# Altium PCB PCB1.PcbDoc
Units mm, origin at the board's own origin, x right, y up, seen from the top; angles counter-clockwise.
Board outline 58.42 x 34.29 mm, 2 copper layers (Top Layer, Bottom Layer); 38 components, 21 nets, 92 pads, 15 vias.
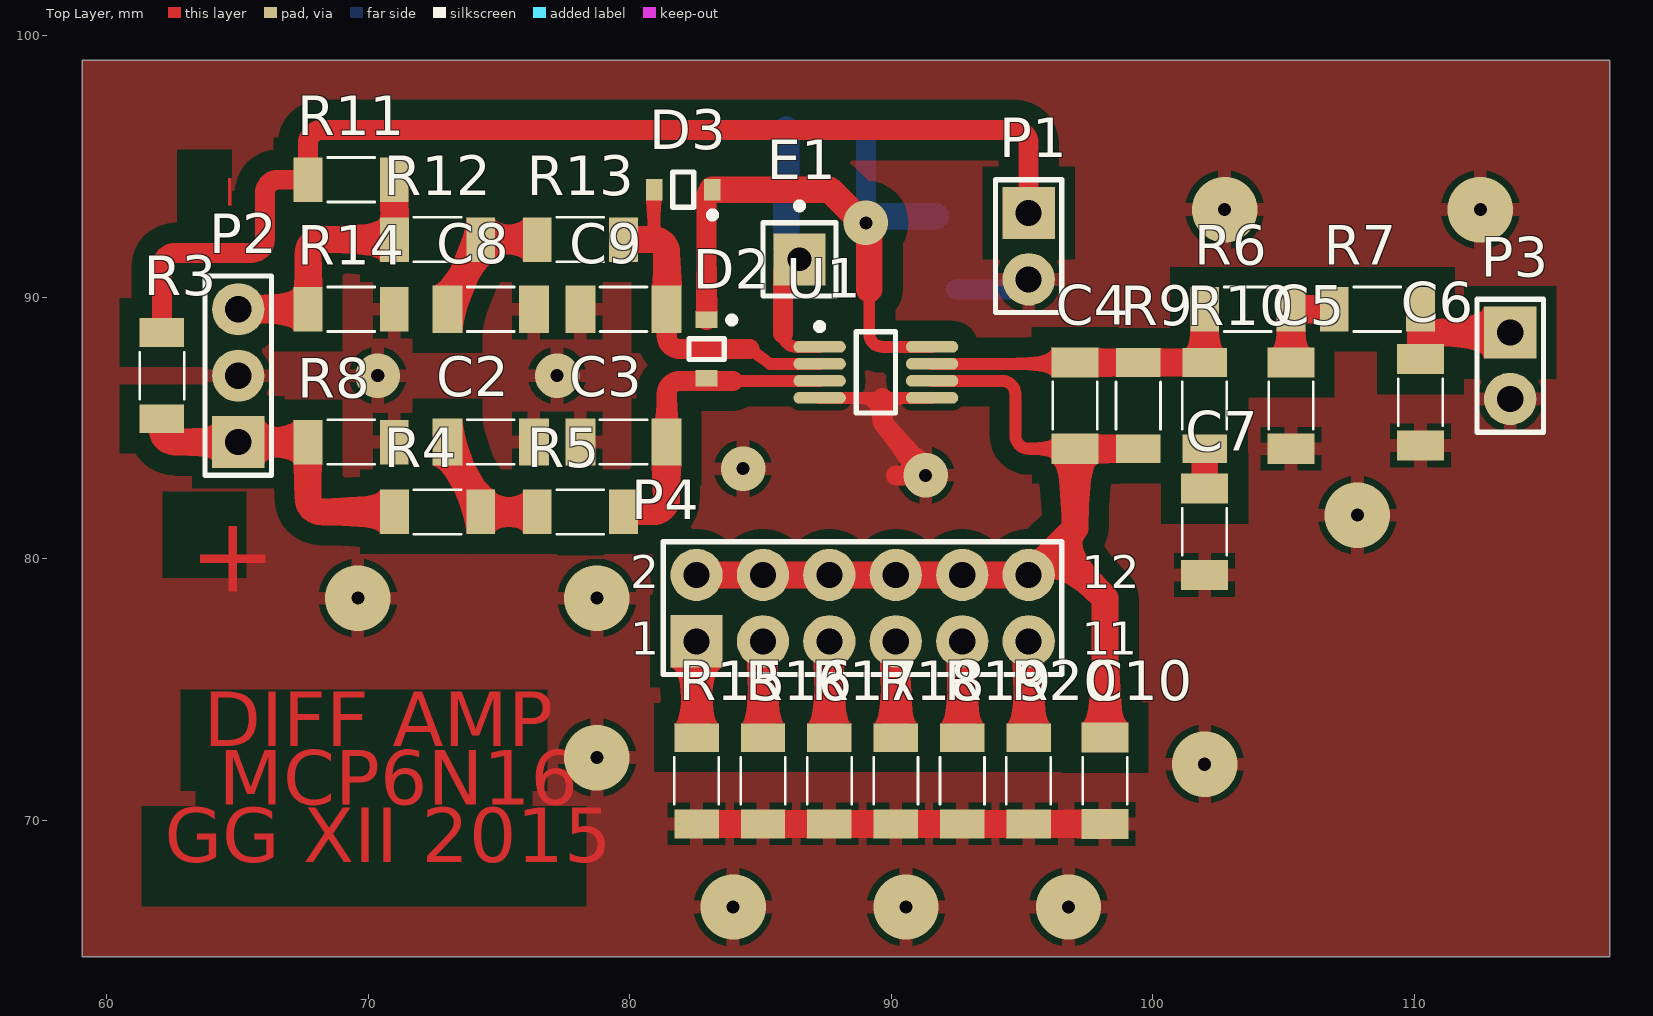
[diagram p0: Top Layer view]
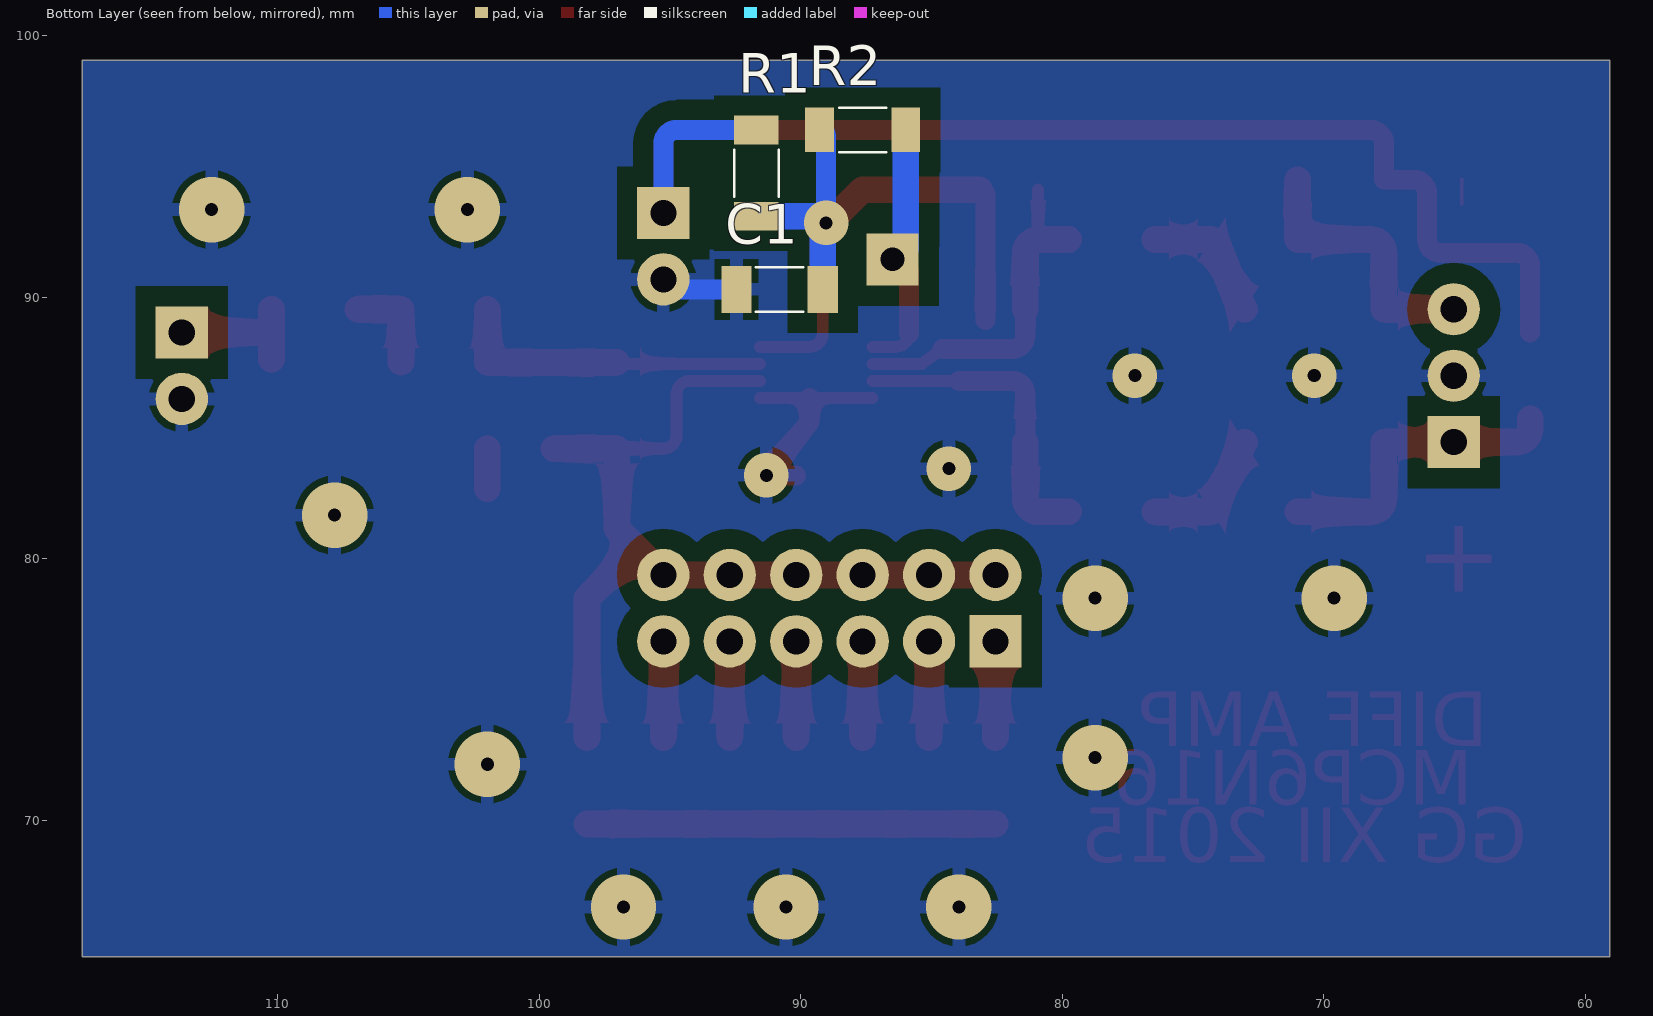
[diagram p1: Bottom Layer view, seen from below]
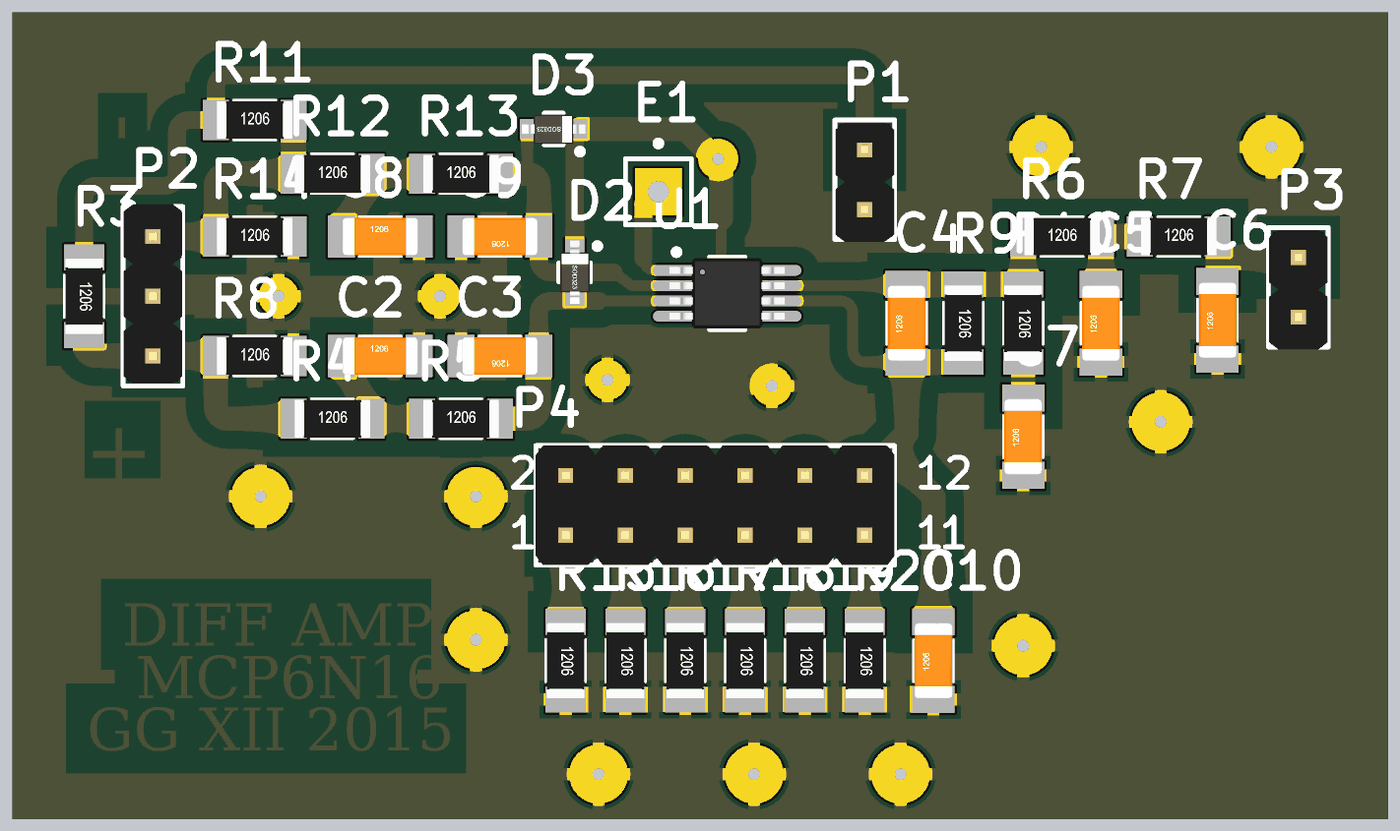
[diagram p2: 3D render of the assembled board from above, using the file's embedded part models]
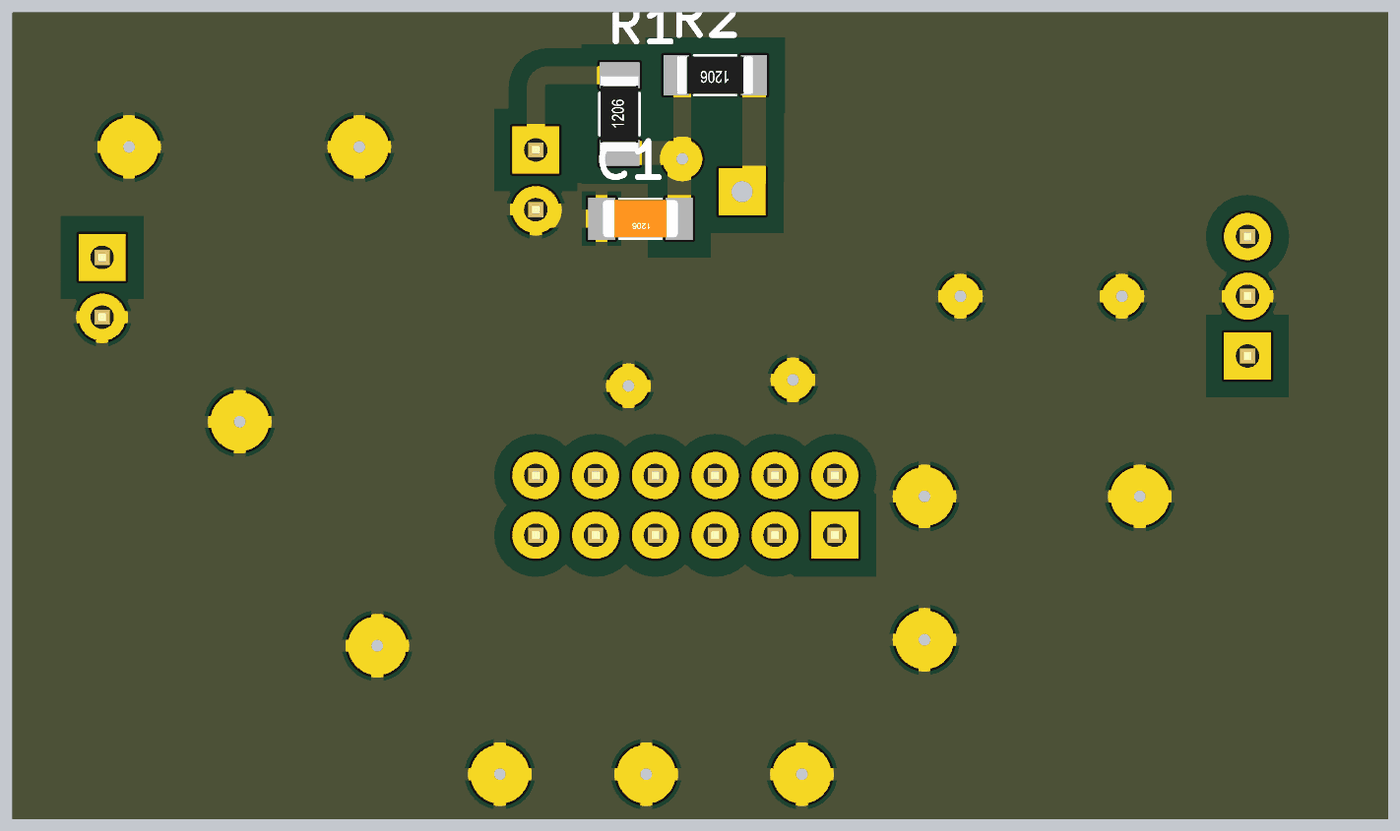
[diagram p3: 3D render of the assembled board from below, using the file's embedded part models]

## Layer stack, top to bottom
Top Solder: solder mask 0.0102, Solder Resist, Dk 3.5
Top Layer: signal copper 0.0356
Dielectric 1: dielectric 0.32, FR-4, Dk 4.8
Bottom Layer: signal copper 0.0356
Bottom Solder: solder mask 0.0102, Solder Resist, Dk 3.5

## Board outline
59.055,64.77 59.055,99.06 117.475,99.06 117.475,64.77

## Design rules (kind name [scope] priority, off if disabled: settings)
Clearance [All] p1: gap=0.254 except(0.762: Arc-Poly Track-Poly SMDPad-Poly THPad-Poly Via-Poly Fill-Poly Poly-Poly Poly-Region Poly-Text)
PolygonConnect [All] p1: connectstyle=Relief reliefconductorwidth=0.508 reliefentries=4 polygonreliefangle="90 Angle" airgapwidth=0.254
RoutingVias [All] p1: holewidth=0.711 width=1.27 viastyle="Through Hole" minholewidth=0.711 minwidth=1.27 maxholewidth=0.711 maxwidth=1.27
SolderMaskExpansion [All] p1: expansion=0.102
Width [All] p1: maxlimit=2.54 minlimit=0.254 preferedwidth=0.508 minimp=50.000000 maximp=50.000000 favimp=50.000000
30 further rules are at their usual default settings.

## Classes and differential pairs
component class Designator: C1 C2 C3 C4 C5 C6 C7 C8 C9 C10 D2 D3 P4 R1 R2 R3 R4 R5 R6 R7 R8 R9 R10 R11 R12 R13 R14 R15 R16 R17 R18 R19 R20 U1
component class top: E1 P1 P2 P3

## Components (designator, comment, footprint, x,y, rotation, side; value= is the part's Value field where it differs from the comment)
C1 "C" C1206 90.805,90.297 r0 bottom
C2 "C" C1206 74.676,84.455 r0 top
C3 "C" C1206 79.756,84.455 r180 top
C4 "C" C1206 97.028,85.852 r90 top
C5 "C" C1206 105.283,85.852 r90 top
C6 "C" C1206 110.236,85.979 r90 top
C7 "C" C1206 101.981,81.026 r90 top
C8 "C" C1206 74.676,89.535 r0 top
C9 "C" C1206 79.756,89.535 r180 top
C10 "C" C1206 98.171,71.501 r90 top
D2 "Schottky" SOD-323 82.931,88.011 r270 top
D3 "Schottky" SOD-323 82.042,94.107 r180 top
E1 "Antenna" PIN1 86.487,91.44 r0 top
P1 "Header 2" "HEADER 1X2 Male" 95.25,93.218 r270 top
P2 "Header 3" "HEADER 1X3 MALE" 65.024,84.455 r90 top
P3 "Header 2" "HEADER 1X2 Male" 113.665,88.646 r270 top
P4 "Header 6X2" "HEADER 2X6 Male" 82.55,76.835 r0 top
R1 "R" 1206 91.694,94.742 r90 bottom
R2 "R" 1206 87.63,96.393 r0 bottom
R3 "R" 1206 62.103,86.995 r270 top
R4 "R" 1206 72.644,81.788 r0 top
R5 "R" 1206 78.105,81.788 r0 top
R6 "R" 1206 103.632,89.535 r0 top
R7 "R" 1206 108.585,89.535 r0 top
R8 "R" 1206 69.342,84.455 r0 top
R9 "R" 1206 99.441,85.852 r270 top
R10 "R" 1206 101.981,85.852 r270 top
R11 "R" 1206 69.342,94.488 r0 top
R12 "R" 1206 72.644,92.202 r0 top
R13 "R" 1206 78.105,92.202 r0 top
R14 "R" 1206 69.342,89.535 r0 top
R15 "R" 1206 82.55,71.501 r270 top
R16 "R" 1206 85.09,71.501 r270 top
R17 "R" 1206 87.63,71.501 r270 top
R18 "R" 1206 90.17,71.501 r270 top
R19 "R" 1206 92.71,71.501 r270 top
R20 "R" 1206 95.25,71.501 r270 top
U1 "MCP6N16" MSOP-MS8_M 89.408,87.122 r0 top

## Footprints (in the part's own frame and the unit in brackets; to place one, negate y for a bottom-side part, rotate by r counter-clockwise, add the part's x,y. Pads: shape width x height; smd on the part's side, far side on the other; paste and mask are expansions set on the pad)
1206 [mm] "SMD Resistor, Inch 1206, Metric 3216."
  rect 1.1x1.7 smd: 1(-1.65,0) 2(1.65,0)
  silkscreen extent -0.9,-0.85 0.9,0.85, body extent -1.6,-0.8 1.6,0.8, height 0.8
C1206 [mm] "SMD Capacitor, Inch 1206, Metric 3216."
  rect 1.15x1.8 smd: 1(-1.65,0) 2(1.65,0)
  silkscreen extent -0.9,-0.85 0.9,0.85, body extent -1.6,-0.8 1.6,0.8, height 1
"HEADER 1X2 Male" [mm] "Connector; Header; 2 Position; Straight; Male"
  rect 2x2 hole 1: 1(0,0)
  round 2 hole 1: 2(2.54,0)
  silkscreen extent -1.27,-1.27 3.81,1.27, body extent -1.17,-1.25 3.91,1.25, height 8.2
"HEADER 1X3 MALE" [mm] "Connector; Header; 3 Position, Male"
  rect 2x2 hole 1: 1(0,0)
  round 2 hole 1: 2(2.54,0) 3(5.08,0)
  silkscreen extent -1.27,-1.27 6.35,1.27, body extent -1.17,-1.25 6.45,1.25, height 8.2
"HEADER 2X6 Male" [mm] "Connector; Header; 6x2 Position; Male"
  rect 2x2 hole 1: 1(0,0)
  round 2 hole 1: 2(0,2.54) 3(2.54,0) 4(2.54,2.54) 5(5.08,0) 6(5.08,2.54) 7(7.62,0) 8(7.62,2.54) 9(10.16,0) 10(10.16,2.54) 11(12.7,0) 12(12.7,2.54)
  silkscreen extent -1.27,-1.27 13.97,3.81, body extent -1.27,-1.27 13.97,3.81, height 8.5
MSOP-MS8_M [mm] "TSOP, 8-Leads, Body 3x3mm, Pitch 0.65mm, IPC Low Density"
  oval 2x0.45 smd: 1(-2.15,0.975) 2(-2.15,0.325) 3(-2.15,-0.325) 4(-2.15,-0.975) 5(2.15,-0.975) 6(2.15,-0.325) 7(2.15,0.325) 8(2.15,0.975)
  silkscreen extent -2.27,-1.55 0.75,1.87, body extent -2.45,-1.5 2.45,1.5, height 1.15
PIN1 [mm] "Generic Antenna; 1 Lead"
  rect 2x2 hole 0.9: 1(0,0)
  silkscreen extent -1.4,-1.4 1.4,2.17
SOD-323 [mm] "SOD, 2-Leads, Body 1.7x1.25mm"
  rect 0.63x0.83 smd: 1(1.115,0) 2(-1.115,0)
  silkscreen extent -1.24,-0.67 0.4,1.09, body extent -1.35,-0.61 1.35,0.64, height 1.1

## Part data
C1 C2 C3 C4 C5 C6 C7 C8 C9 C10: library part Cap, "Generic capacitor"
D2 D3: library part SchottkyX, "Schottky Rectifier"
E1: "Generic Antenna"
P1 P3: "Header, 2-Pin"
P2: "Header, 3-Pin"
P4: "Header, 6-Pin, Dual row"
R1 R2 R3 R4 R5 R6 R7 R8 R9 R10 R11 R12 R13 R14 R15 R16 R17 R18 R19 R20: library part Res, "Generic resistor"

## Via types
v1: diameter 2.5, hole 0.5, Top Layer to Bottom Layer, 10 vias
v2: diameter 1.7, hole 0.5, Top Layer to Bottom Layer, 5 vias

## Nets (pads, with @x,y where several pads share a name; then routed paths per layer and width w, separated by ;. In a path a pad name is that pad's centre, name@x,y a point inside that pad or via, vN(x,y) a via of type N, cw(c..) or ccw(c..) an arc to the next point about the centre after c; other vN are vias at no path point)
3V3: P1.1 R1.2 R3.1 R11.1 | length 49.5
  Top Layer w0.762: R3.1 62.103,91.186 cw(c62.611,91.186) 62.611,91.694 65.532,91.694 ccw(c65.532,92.202) 66.04,92.202 66.04,93.98 cw(c66.548,93.98) 66.548,94.488 R11.1 67.692,95.885 cw(c68.2,95.885) 68.2,96.393 94.742,96.393 cw(c94.742,95.885) 95.25,95.885 P1.1
  Bottom Layer w0.762: R1.2 94.742,96.392 cw(c94.742,95.884) 95.25,95.884 P1.1
GND: C1.2 C2.2 C3.2 C5.1 C6.1 C7.1 C8.2 C9.2 C10.1 P1.2 P2.2 P3.2 R8.2 R14.2 R15.2 R16.2 R17.2 R18.2 R19.2 R20.2 U1.4 U1.5 | length 27.6
  Top Layer w0.457: U1.4 89.662,86.147 U1.5
  Top Layer w0.762: 89.662,86.147 89.662,85.217 v2(91.313,83.185) 90.17,83.185
  Top Layer w1.016: R15.2 R16.2 R17.2 R18.2 R19.2 R20.2 C10.1
  Bottom Layer w0.762: C1.2 94.869,90.297 ccw(c94.869,90.678) P1.2
  other v1: 83.947,66.675 90.56,66.675 96.774,66.675 101.981,72.136 78.74,72.39 69.596,78.486 78.74,78.486 107.823,81.661 102.743,93.345 112.522,93.345
  other v2: 84.328,83.439 70.358,86.995 77.216,86.995
NetC1_1: C1.1 D2.2 D3.2 R1.1 R2.2 U1.8 | length 27.5
  Top Layer w0.457: 89.154,90.298 89.154,88.605 ccw(c89.662,88.605) 89.662,88.097 U1.8
  Top Layer w0.762: D2.2 82.931,93.881 cw(c83.157,93.881) D3.2
  Top Layer w1.016: D3.2 87.63,94.107 89.154,92.583 89.154,90.298
  Bottom Layer w0.762: v2(89.027,92.837) 89.027,96.14 cw(c89.28,96.14) R2.2
  Bottom Layer w1.016: C1.1 89.155,92.709 ccw(c89.027,92.709) v2(89.027,92.837) cw(c89.282,92.837) 89.282,93.092 R1.1
NetC2_1: C2.1 R4.2 R5.1 | length 5.1
  Top Layer w1.016: C2.1 R4.2 R5.1
NetC3_1: C3.1 D2.1 R5.2 U1.3 | length 12.1
  Top Layer w0.457: 83.947,86.797 U1.3
  Top Layer w0.762: C3.1 81.406,86.289 cw(c81.914,86.289) 81.914,86.797 83.947,86.797
  Top Layer w1.016: R5.2 80.898,81.788 ccw(c80.898,82.296) 81.406,82.296 C3.1
NetC4_1: C4.1 C10.2 P4.2 P4.4 P4.6 P4.8 P4.10 P4.12 R9.2 U1.6 | length 36.3
  Top Layer w0.457: U1.6 94.234,86.797 cw(c94.234,86.289) 94.742,86.289 94.742,84.71 ccw(c95.25,84.71) 95.25,84.202 C4.1
  Top Layer w1.016: P4.2 P4.4 P4.6 P4.8 P4.10 P4.12 96.266,80.391 ; C10.2 98.171,78.486 96.266,80.391 ; R9.2 C4.1 97.028,81.153 96.266,80.391
NetC4_2: C4.2 R6.1 R9.1 R10.1 U1.7 | length 12.5
  Top Layer w0.457: U1.7 97.028,87.447 C4.2
  Top Layer w1.016: C4.2 R9.1 R10.1 R6.1
NetC5_2: C5.2 R6.2 R7.1 | length 3.7
  Top Layer w1.016: C5.2 R6.2 R7.1
NetC6_2: C6.2 P3.1 R7.2 | length 5.3
  Top Layer w1.016: R7.2 110.235,88.646 ; C6.2 110.235,88.646 ; P3.1 110.235,88.646
NetC7_2: C7.2 R10.2 | length 1.5
  Top Layer w1.016: C7.2 R10.2
NetC8_1: C8.1 R12.2 R13.1 | length 5.1
  Top Layer w1.016: C8.1 R12.2 R13.1
NetC9_1: C9.1 D3.1 R13.2 U1.2 | length 13.4
  Top Layer w0.457: 80.898,92.202 80.927,92.231 D3.1 ; 84.582,88.011 85.356,87.447 U1.2
  Top Layer w0.762: C9.1 81.406,88.519 ccw(c81.914,88.519) 81.914,88.011 84.582,88.011
  Top Layer w1.016: R13.2 80.898,92.202 cw(c80.898,91.694) 81.406,91.694 C9.1
NetE1_1: E1.1 R2.1 U1.1 | length 10.6
  Top Layer w0.457: 85.852,88.605 ccw(c86.36,88.605) 86.36,88.097 U1.1
  Top Layer w0.762: 85.852,88.605 85.852,90.932 cw(c86.36,90.932) 86.36,91.44 E1.1
  Bottom Layer w0.457: E1.1@86.107,91.44 E1.1
  Bottom Layer w1.016: R2.1 85.98,91.947 ccw(c86.487,91.947) E1.1
NetP2_1: P2.1 R3.2 R4.1 R8.1 | length 12
  Top Layer w1.016: R3.2 62.103,84.963 ccw(c62.611,84.963) 62.611,84.455 P2.1 R8.1 67.692,82.295 ccw(c68.2,82.295) 68.2,81.787 R4.1
NetP2_3: P2.3 R11.2 R12.1 R14.1 | length 10.7
  Top Layer w1.016: P2.3 R14.1 67.692,91.694 cw(c68.2,91.694) 68.2,92.202 R12.1 ; R11.2 R12.1 ; R12.1 R12.1
NetP4_1: P4.1 R15.1 | length 3.7
  Top Layer w1.016: R15.1 P4.1
NetP4_3: P4.3 R16.1 | length 3.7
  Top Layer w1.016: R16.1 P4.3
NetP4_5: P4.5 R17.1 | length 3.7
  Top Layer w1.016: R17.1 P4.5
NetP4_7: P4.7 R18.1 | length 3.7
  Top Layer w1.016: R18.1 P4.7
NetP4_9: P4.9 R19.1 | length 3.7
  Top Layer w1.016: R19.1 P4.9
NetP4_11: P4.11 R20.1 | length 3.7
  Top Layer w1.016: R20.1 P4.11

## Polygon pours and split planes (outlines as drawn)
GND on Top Layer "Bottom Layer-No Net" (solid, remove dead copper, pour order 2): 117.475,64.77 117.475,99.06 59.055,99.06 59.055,64.77
GND on Bottom Layer "Bottom Layer-No Net" (solid, remove dead copper, pour order 4): 59.055,99.06 59.055,64.77 117.475,64.77 117.475,99.06

## Other copper
Top Layer:
  pour cut-out: 103.632,83.82 103.632,86.741 cw(c103.505,86.741) 103.505,86.614 95.377,86.614 95.377,85.217 ccw(c95.504,85.217) 95.504,85.09 103.124,85.09 cw(c103.124,84.963) 103.251,84.963 103.251,83.82
  pour cut-out: 108.247,91.147 108.247,87.923 108.966,87.884 109.347,90.043 108.923,91.147
  pour cut-out: 103.294,91.147 103.97,91.147 104.394,88.773 104.013,88.265 102.87,88.265
  pour cut-out: 77.47,90.424 78.74,90.424 78.74,93.472 78.224,93.814 77.767,93.814 77.47,93.726
  pour cut-out: 77.216,83.566 77.216,80.137 78.994,80.137 78.935,83.4 78.232,83.566
  pour cut-out: 71.882,95.377 71.882,91.059 73.66,91.059 73.66,95.377
  pour cut-out: 71.882,82.804 71.882,80.176 73.66,80.176 73.66,82.804
  text "-" at 62.772,94.742 h5 r270
  text "+" at 62.611,81.661 h5 r270
  text "DIFF AMP" at 63.711,72.136 h3.56
  text "MCP6N16" at 64.281,69.897 h3.56
  text "GG XII 2015" at 62.217,67.691 h3.56
Bottom Layer:
  pour cut-out: 93.306,91.78 cw(c93.347,91.78) 93.347,91.821 93.726,91.821 93.726,92.583 93.091,92.583
  pour cut-out: 87.038,98.005 87.968,98.005 87.968,95.742 87.038,95.742

## Dimensions
117.475,99.06 to 117.475,64.77 on Mechanical 1
59.055,99.06 to 117.475,99.06 on Mechanical 1

## Text inside footprints (layer, text, board x,y; h text height)
P4: Top Overlay "12" at 97.282,78.867 h1.27; Top Overlay "1" at 98.298,76.327 h1.27; Top Overlay "1" at 97.282,76.327 h1.27; Top Overlay "1" at 80.01,76.327 h1.27; Top Overlay "2" at 80.01,78.867 h1.27